# Altium PCB sensors_7.PcbDoc
Units mil, origin at the board's own origin, x right, y up, seen from the top; angles counter-clockwise.
Board outline 2920 x 690 mil, 2 copper layers (Top Layer, Bottom Layer); 29 components, 26 nets, 82 pads, 0 vias.
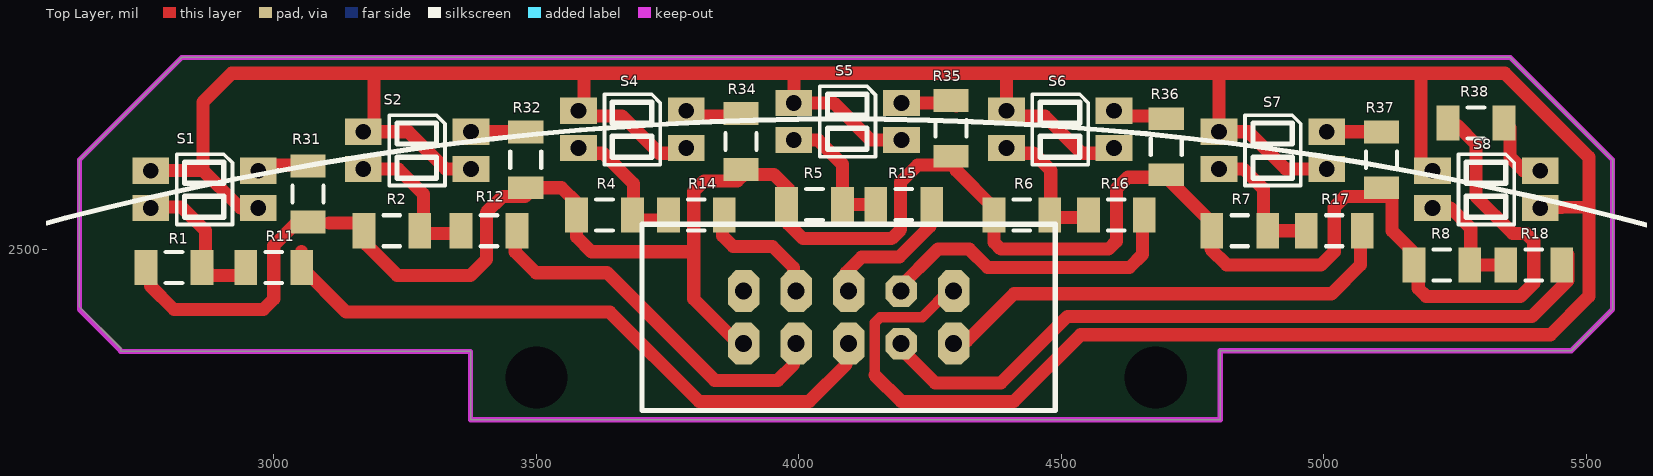
[diagram p0: Top Layer view]
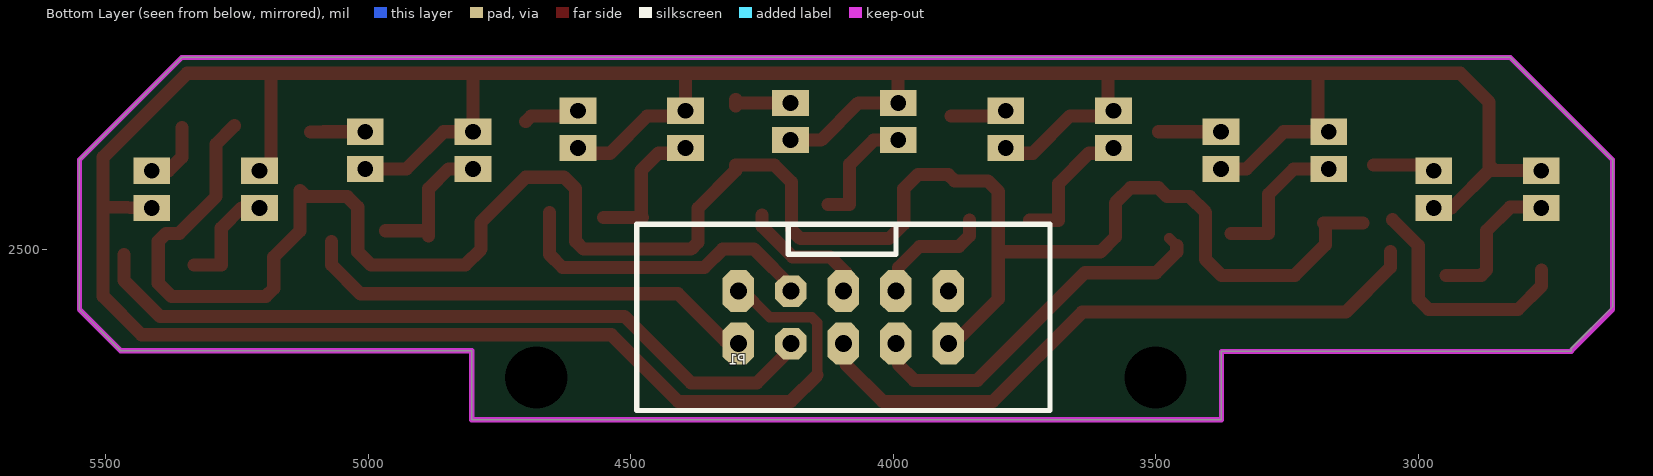
[diagram p1: Bottom Layer view, seen from below]

## Layer stack, top to bottom
Top Layer: signal copper 1.4
Dielectric: dielectric 12.6, FR-4, Dk 4.8
Bottom Layer: signal copper 1.4

## Board outline
2630,2670.31 2824.69,2865 5355.31,2865 5550,2670.31 5550,2385 5471.25,2306.25 4802.8,2306.25 4802.8,2175 3375,2175 3375,2305 2708.75,2305 2708.75,2311.25 2630,2390 2630,2670.31

## Design rules (kind name [scope] priority, off if disabled: settings)
Clearance [All] p1: gap=10
PolygonConnect [All] p1: connectstyle=Relief reliefconductorwidth=10 reliefentries=4 polygonreliefangle="90 Angle" airgapwidth=10
RoutingVias [All] p1: holewidth=28 width=50 viastyle="Through Hole" minholewidth=28 minwidth=50 maxholewidth=28 maxwidth=50
SolderMaskExpansion [All] p1: expansion=4
Width [All] p1: maxlimit=30 minlimit=15 preferedwidth=25 bottomlayer_minwidth=25 minimp=50.000000 maximp=50.000000 favimp=50.000000
28 further rules are at their usual default settings.

## Components (designator, comment, footprint, x,y, rotation, side; value= is the part's Value field where it differs from the comment)
P1 "Header 5X2" "HDR-5x2 CON 2" 4095,2370 r0 bottom (schematic designator P2)
R1 "Res1" C1206 2810,2465 r180 top (schematic designator R25)
R2 "Res1" C1206 3225,2535 r180 top (schematic designator R26)
R4 "Res1" C1206 3630,2565 r180 top (schematic designator R27)
R5 "Res1" C1206 4030,2585 r180 top (schematic designator R28)
R6 "Res1" C1206 4425,2565 r180 top (schematic designator R29)
R7 "Res1" C1206 4840,2535 r180 top (schematic designator R40)
R8 "Res1" C1206 5225,2470 r180 top (schematic designator R41)
R11 "Res1" C1206 3000,2465 r180 top (schematic designator R35)
R12 "Res1" C1206 3410,2535 r180 top (schematic designator R36)
R14 "Res1" C1206 3805,2565 r180 top (schematic designator R37)
R15 "Res1" C1206 4200,2585 r180 top (schematic designator R38)
R16 "Res1" C1206 4605,2565 r180 top (schematic designator R39)
R17 "Res1" C1206 5020,2535 r180 top (schematic designator R44)
R18 "Res1" C1206 5400,2470 r180 top (schematic designator R45)
R31 "Res1" C1206 3065,2605 r270 top (schematic designator R30)
R32 "Res1" C1206 3480,2670 r270 top (schematic designator R31)
R34 "Res1" C1206 3890,2705 r270 top (schematic designator R32)
R35 "Res1" C1206 4290,2730 r270 top (schematic designator R33)
R36 "Res1" C1206 4700,2695 r270 top (schematic designator R34)
R37 "Res1" C1206 5110,2670 r270 top (schematic designator R42)
R38 "Res1" C1206 5290,2740 r180 top (schematic designator R43)
S1 "ITR8307_1" "ITR8307 - TH" 2815,2680.63 r180 top (schematic designator S9)
S2 "ITR8307_1" "ITR8307 - TH" 3220,2755 r180 top (schematic designator S10)
S4 "ITR8307_1" "ITR8307 - TH" 3630,2794.84 r180 top (schematic designator S11)
S5 "ITR8307_1" "ITR8307 - TH" 4040,2810 r180 top (schematic designator S12)
S6 "ITR8307_1" "ITR8307 - TH" 4445,2794.84 r180 top (schematic designator S13)
S7 "ITR8307_1" "ITR8307 - TH" 4850,2755 r180 top (schematic designator S14)
S8 "ITR8307_1" "ITR8307 - TH" 5256.5,2680.63 r180 top (schematic designator S15)

## Footprints (in the part's own frame and the unit in brackets; to place one, negate y for a bottom-side part, rotate by r counter-clockwise, add the part's x,y. Pads: shape width x height; smd on the part's side, far side on the other; paste and mask are expansions set on the pad)
C1206 [mm] "Chip Capacitor, Body 3.2x1.6mm, IPC High Density"
  rect 1.1x1.7 smd: 1(-1.35,0) 2(1.35,0)
  silkscreen extent -0.4,-0.75 0.4,0.75, body extent -1.7,-0.9 1.7,0.9, height 1.3
"HDR-5x2 CON 2" [mil]
  oct 60x80 hole 32: 1(-200,50) 2(-200,-50) 3(-100,50) 4(-100,-50) 5(0,50) 6(0,-50) 9(200,50) 10(200,-50)
  oct 60x60 hole 32: 7(100,50) 8(100,-50)
  silkscreen extent -394,-177 394,177, body extent -400,-174 400,180, height 360
"ITR8307 - TH" [mil]
  rect 70x50 hole 30: 1(-155.67,102.36) 2(-155.67,31.5) 3(49.37,31.5) 4(49.37,102.36)
  silkscreen extent -106,0 0,134, body extent -139,-5 39,137, height 60

## Part data
P1: "Header, 5-Pin, Dual row"
R1 R2 R4 R5 R6 R7 R8 R11 R12 R14 R15 R16 R17 R18 R31 R32 R34 R35 R36 R37 R38: "Resistor"

## Free pads (board coordinates)
  round 60 hole 118.11: 0(3500.32,2255.32) 0(4680,2255.32)

## Nets (pads, with @x,y where several pads share a name; then routed paths per layer and width w, separated by ;. In a path a pad name is that pad's centre, name@x,y a point inside that pad or via, vN(x,y) a via of type N, cw(c..) or ccw(c..) an arc to the next point about the centre after c; other vN are vias at no path point)
GND: P1.10 S1.1 S1.3 S2.1 S2.3 S4.1 S4.3 S5.1 S5.3 S6.1 S6.3 S7.1 S7.3 S8.1 S8.3 | length 6995.1
  Top Layer w20: 4145,2260 4145,2360 4155,2370 4235,2370 P1.10@4290,2425
  Top Layer w25: S1.3@2785.63,2650 2865,2650 2865,2780 2920,2835 3190.63,2835 ; 2860,2655 2936.73,2578.27 S1.1@2990.67,2578.27 ; S2.1@3395.67,2652.64 3327.36,2652.64 3256.5,2723.5 3190.63,2723.5 3190.63,2835 ; 3590.63,2835 3590.63,2753.5 3663.5,2753.5 3734.37,2682.64 ; 3737.36,2682.64 S4.1@3795.67,2682.64 ; 4145,2260 4195,2210 4410,2210 4536.87,2336.87 5431.87,2336.87 5505,2410 5505,2675 5345,2835 4800.63,2835 ; S5.1 4137.36,2707.64 4066.5,2778.5 S5.3 3990.63,2835 ; 4395.63,2835 4395.63,2753.5 4468.5,2753.5 4539.37,2682.64 S6.1@4600.67,2682.64 ; S7.1 4927.36,2652.64 4856.5,2723.5 S7.3 4800.63,2835 ; 5185,2835 5185,2669.76 S8.3@5205.63,2649.13 ; S8.1 5500,2580 ; 3190.63,2835 3990.63,2835 ; 3990.63,2835 4800.63,2835
NetR1_1: R1.1 R11.2 S1.4 | length 259
  Top Layer w25: S1.4@2785.63,2580 2825,2580 2870,2535 2870,2460 2880,2450 R11.2@2946.85,2450
NetR2_1: R2.1 R12.2 S2.4 | length 261
  Top Layer w25: S2.4@3190.63,2652.64 3237.36,2652.64 3285,2605 3285,2530 R12.2@3356.85,2530
NetR3_1: 
NetR4_1: R4.1 R14.2 S4.4 | length 243.2
  Top Layer w25: S4.4@3590.63,2682.64 3627.36,2682.64 3685,2625 3685,2555 R14.2@3740,2555
NetR5_1: R5.1 R15.2 S5.4 | length 228.9
  Top Layer w25: S5.4 4037.36,2707.64 4083.15,2661.85 R5.1 4123.7,2585
NetR6_1: R6.1 R16.2 S6.4 | length 261.6
  Top Layer w25: S6.4@4395.63,2682.64 4447.36,2682.64 4480,2650 R6.1@4480,2560 ; R6.1@4478.15,2560 R6.1@4480,2560 ; R16.2@4551.85,2560 R6.1@4480,2560
NetR7_1: R7.1 R17.2 S7.4 | length 263.7
  Top Layer w25: S7.4 4847.36,2652.64 4885,2615 R7.1@4885,2525 ; R7.1 R17.2
NetR8_1: R8.1 R18.2 S8.4 | length 210.6
  Top Layer w25: S8.4 5241.73,2578.27 5280,2540 5280,2470 R18.2@5331.85,2470
NetR31_1: R31.1 S1.2 | length 140.6
  Top Layer w25: S1.2 2959.8,2660 R31.1@3085,2660
NetR32_1: R32.1 S2.2 | length 99.5
  Top Layer w25: S2.2@3395.67,2723.5 3494.65,2723.5 R32.1@3495,2723.15
NetR33_1: 
NetR34_1: R34.1 S4.2 | length 94
  Top Layer w25: S4.2@3795.67,2753.5 R34.1@3889.65,2753.5
NetR35_1: R35.1 S5.2 | length 118.4
  Top Layer w25: S5.2 4294.65,2778.5 4300,2773.15 R35.1@4300,2785
NetR36_1: R36.1 S6.2 | length 103.6
  Top Layer w25: S6.2@4600.67,2753.5 4689.65,2753.5 R36.1@4700,2743.15
NetR37_1: R37.1 S7.2 | length 104.5
  Top Layer w25: S7.2 5084.65,2723.5 5085,2723.15 R37.1
NetR38_1: R38.1 S8.2 | length 123.2
  Top Layer w25: R38.1@5355,2731.85 5355,2675 5380.87,2649.13 S8.2@5410.67,2649.13
OUT1: P1.5 R11.1 | length 1239.1
  Top Layer w25: R11.1@3053.15,2495 R11.1 3138.15,2380 3640,2380 3810,2210 4020,2210 4090,2280 4090,2300 P1.5@4102.5,2312.5
OUT2: P1.3 R12.1 | length 720.9
  Top Layer w20: R12.1@3460,2506.69 R12.1@3474.15,2520.85
  Top Layer w25: R12.1@3460,2506.69 3460,2494.5 3499.5,2455 3635,2455 3840,2250 3960,2250 3990,2280 P1.3@3990,2325
OUT3: P1.2
OUT4: P1.4 R14.1 | length 229.9
  Top Layer w25: R14.1@3855,2555 3855,2525 3875,2505 3950,2505 3990,2465 P1.4@3990,2425
OUT5: P1.6 R15.1 | length 248.1
  Top Layer w25: P1.6@4090,2425 4090,2455 4120,2485 4191.43,2485 4250,2543.57 R15.1@4250,2565
OUT6: P1.8 R16.1 | length 600.9
  Top Layer w25: P1.8@4190,2425 4265,2500 4325,2500 4360,2465 4630,2465 4655,2490 R16.1@4655,2570
OUT7: P1.9 R17.1 | length 884.6
  Top Layer w25: P1.9@4290,2325 4320,2325 4410,2415 5015,2415 5070,2470 R17.1@5070,2514.5
OUT8: P1.7 R18.1 | length 1444.8
  Top Layer w25: P1.7@4190,2325 4190,2315 4260,2245 4385,2245 4511.87,2371.87 5396.87,2371.87 5465,2440 R18.1@5465,2490
VCC: P1.1 R1.2 R2.2 R4.2 R5.2 R6.2 R7.2 R8.2 R31.2 R32.2 R34.2 R35.2 R36.2 R37.2 R38.2 | length 4563.4
  Top Layer w25: R1.2@2765,2460 2765,2430 2810,2385 2980,2385 3000,2405 3000,2506.85 R31.2@3049.07,2555.93 ; 3105,2550 3180,2550 3176.85,2546.85 3176.85,2508.15 3235,2450 3375,2450 3405,2480 3405,2570 3435,2600 3478.15,2600 3495,2616.85 3548.15,2616.85 3576.85,2588.15 3576.85,2523.15 3605,2495 3800,2495 ; P1.1@3890,2325 3880,2325 3800,2405 3800,2610 3820,2630 3883.15,2630 3895,2641.85 3953.15,2641.85 3980,2615 3980,2548.06 4008.06,2520 4176.93,2520 4194,2537.07 4194,2627.78 4226.21,2660 4300,2660 4300,2650 4371.85,2578.15 4371.85,2513.15 4385,2500 4590,2500 4605,2515 4605,2615 4626.85,2636.85 4700,2636.85 4785,2551.85 4785,2500 4815,2470 4995,2470 5020,2495 5020,2580 5040,2600 5118.15,2600 5130,2611.85 5130,2535 5180,2485 5180,2425 5195,2410 5375,2410 5400,2435 5400,2515 5385,2530 5360,2530 5290,2600 5290,2700 R38.2@5255,2735

## Keep-outs
Keep-Out Layer:
  lines w10: 2708.75,2305 3375,2305 3375,2175 4802.8,2175 4802.8,2306.25 5471.25,2306.25 5550,2385 5550,2670.31 5355.31,2865 2824.69,2865 2630,2670.31 ; 2708.75,2306.25 2630,2385 ; 2630,2385 2630,2670.31 ; 2630,2385 2630,2670.31

## Silkscreen, mask and mechanical layers (free items; w line width, h text height)
Top Overlay:
  lines w10: 2442.7,2515.24 cw(c4083.97,-3157.61) 5720.47,2516.62 ; 3701.3,2192.83 4488.7,2192.83 4488.7,2547.17 3701.3,2547.17 3701.3,2192.83
  text "R=15 (cm)" at 2040,2600 h60

## Dimensions
4680,2255.32 to 3500.32,2255.32 on Top Overlay
5471.25,2306.25 to 5355.31,2865 on Top Overlay
5550,2670.31 to 2630,2670.31 on Top Overlay
5471.25,2306.25 to 4802.8,2175 on Top Overlay
3375,2175 to 4802.8,2175 on Top Overlay
5355.31,2865 to 2824.69,2865 on Top Overlay